# EAGLE board sensor (EAGLE 7.5.0)
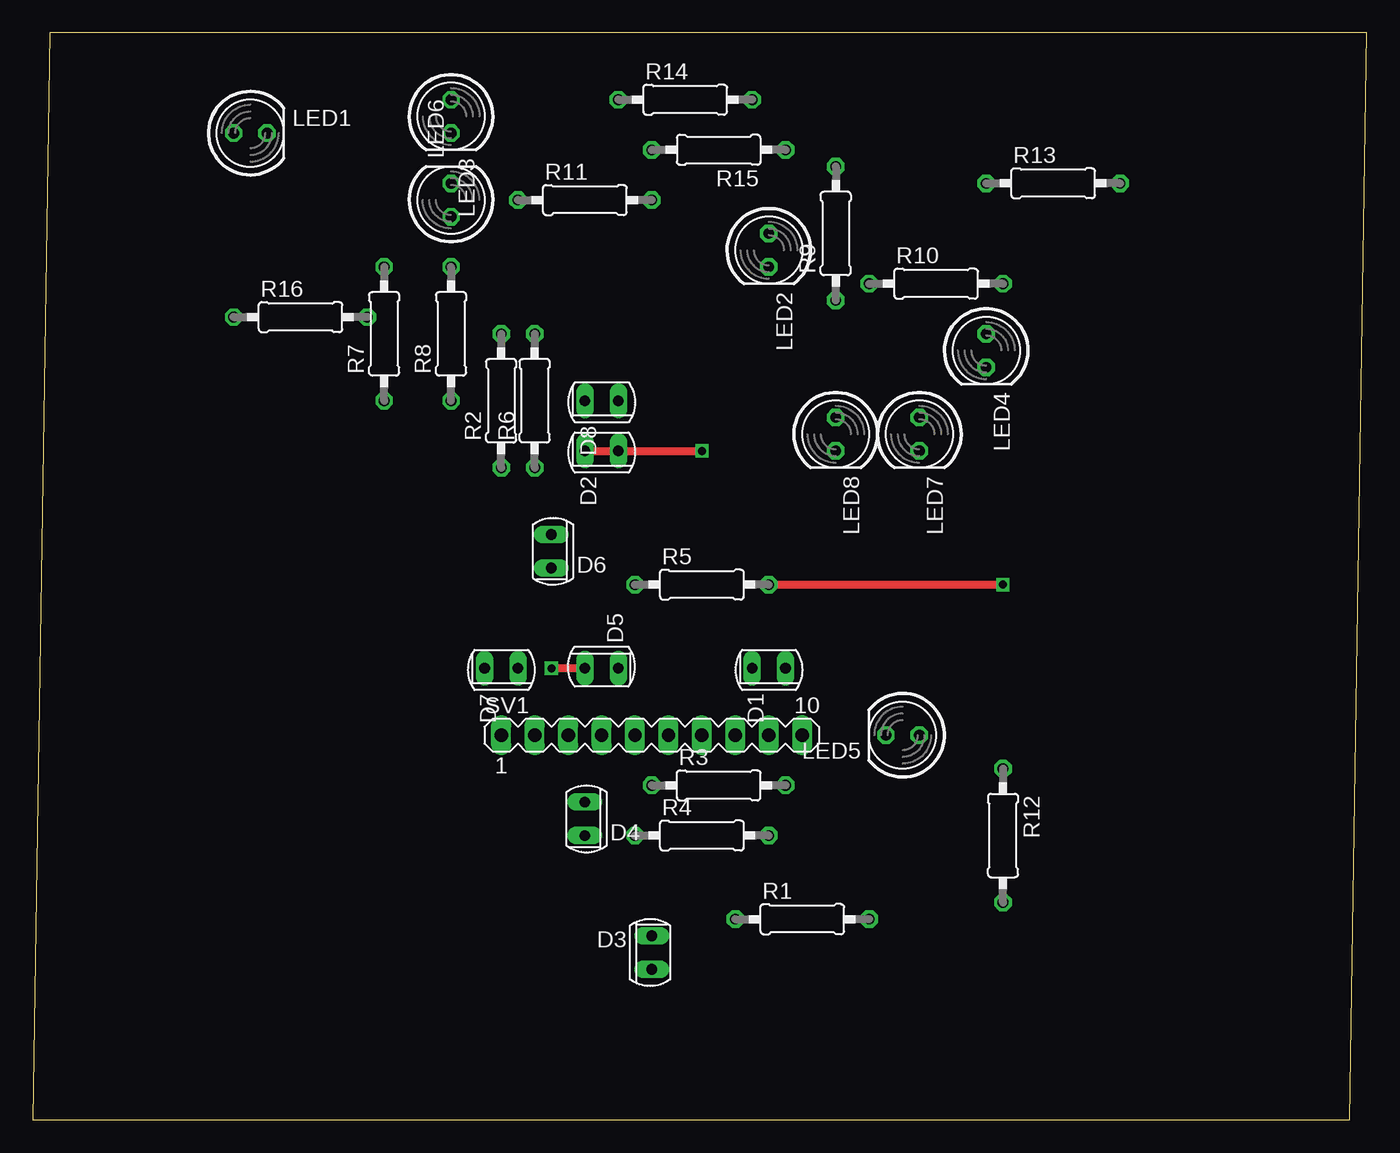
[diagram p0: board, top side]
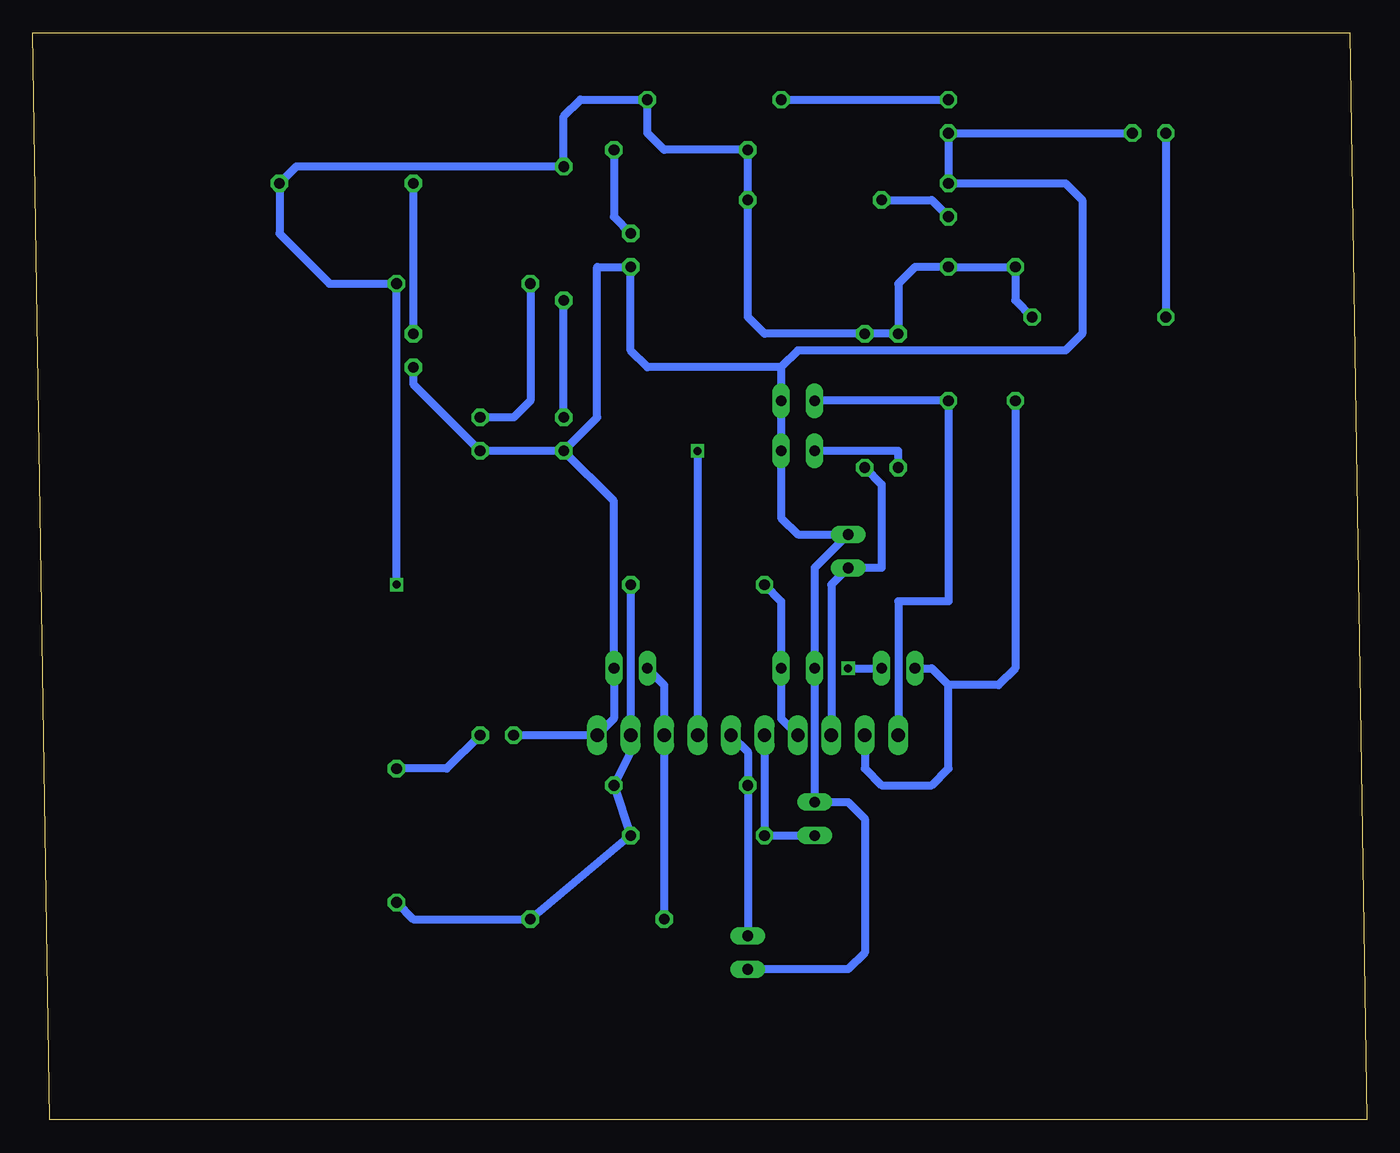
[diagram p1: board, bottom side, seen from below]

Size 101.27 x 82.54 mm. Coordinates in mm from the lower left corner, seen from the top.
Outline: 0,0 100,0 101.27,82.54 1.27,82.54 0,0
Copper layers (1*16): Top 0.035mm / dielectric 1.5mm / Bottom 0.035mm
Design rules "default": minimum track width 10mil, minimum drill 24mil, track to track 8mil, track to pad 8mil, pad to pad 8mil, via to via 8mil, smd to smd 8mil, copper to edge 40mil, drill to drill 8mil, minimum pad ring 10mil, minimum via ring 8mil, stop-mask expansion 4mil, vias tented up to drill 0mil, thermal gap 10mil

## Footprints (pad centres in the part's own frame; a part is rotated, then mirrored left to right if it is on the bottom)
SFH225 = drill 0.813 long: A 0,1.27; K 0,-1.27
LED5MM = drill 0.813 octagon: A -1.27,0; K 1.27,0
0207/10 = drill 0.813 octagon: 1 -5.08,0; 2 5.08,0
MA10-1 = drill 1.016 long: 1 -11.43,0; 2 -8.89,0; 3 -6.35,0; 4 -3.81,0; 5 -1.27,0; 6 1.27,0; 7 3.81,0; 8 6.35,0; 9 8.89,0; 10 11.43,0

## Placement (x,y rotation side)
D1  PhotoDioda  [SFH225]  55.88,34.29 270 top
D2  PhotoDioda  [SFH225]  43.18,50.8 270 top
D3  PhotoDioda  [SFH225]  46.99,12.7 180 top
D4  PhotoDioda  [SFH225]  41.91,22.86 0 top
D5  PhotoDioda  [SFH225]  43.18,34.29 90 top
D6  PhotoDioda  [SFH225]  39.37,43.18 0 top
D7  PhotoDioda  [SFH225]  35.56,34.29 270 top
D8  PhotoDioda  [SFH225]  43.18,54.61 270 top
LED1  LED putih SB  [LED5MM]  16.51,74.93 0 top
LED2  LED putih SB  [LED5MM]  55.88,66.04 270 top
LED3  LED putih SB  [LED5MM]  31.75,76.2 270 top
LED4  LED putih SB  [LED5MM]  72.39,58.42 270 top
LED5  LED putih SB  [LED5MM]  66.04,29.21 180 top
LED6  LED putih SB  [LED5MM]  31.75,69.85 90 top
LED7  LED putih SB  [LED5MM]  67.31,52.07 270 top
LED8  LED putih SB  [LED5MM]  60.96,52.07 270 top
R1  [0207/10]  58.42,15.24 0 top
R2  [0207/10]  35.56,54.61 90 top
R3  [0207/10]  52.07,25.4 0 top
R4  [0207/10]  50.8,21.59 0 top
R5  [0207/10]  50.8,40.64 0 top
R6  [0207/10]  38.1,54.61 90 top
R7  [0207/10]  26.67,59.69 90 top
R8  [0207/10]  31.75,59.69 90 top
R9  330  [0207/10]  60.96,67.31 90 top
R10  330  [0207/10]  68.58,63.5 0 top
R11  330  [0207/10]  41.91,69.85 0 top
R12  330  [0207/10]  73.66,21.59 270 top
R13  330  [0207/10]  77.47,71.12 0 top
R14  330  [0207/10]  49.53,77.47 0 top
R15  330  [0207/10]  52.07,73.66 180 top
R16  330  [0207/10]  20.32,60.96 0 top
SV1  [MA10-1]  46.99,29.21 0 top

## Library data of the parts
D1-D8 = opto-trans-siemens
LED1-LED8 = led
R1-R16 = resistor
SV1 = con-lstb

## Nets
GND: D1.A D2.A D3.A D4.A D5.A D6.A D7.A D8.A LED1.K LED2.K LED3.K LED4.K LED5.K LED6.K LED7.K LED8.K SV1.10
N$1: LED7.A R10.1
N$2: D7.K R7.1 SV1.2
N$3: D8.K R8.1 SV1.1
N$4: D1.K R1.1 SV1.8
N$5: D2.K R2.1 SV1.7
N$6: D3.K R3.1 SV1.6
N$7: D5.K R5.1 SV1.4
N$8: D4.K R4.1 SV1.5
N$9: D6.K R6.1 SV1.3
N$10: LED6.A R11.1
N$11: LED5.A R12.1
N$12: LED4.A R13.1
N$13: LED3.A R14.1
N$14: LED2.A R15.1
N$15: LED1.A R16.1
N$16: LED8.A R9.1
VCC: R1.2 R2.2 R3.2 R4.2 R5.2 R6.2 R7.2 R8.2 R9.2 R10.2 R11.2 R12.2 R13.2 R14.2 R15.2 R16.2 SV1.9

## Tracks (layer width: path | path; a pad name or v marks a point on that pad's centre or on a via)
GND  (via drill 0.6)
  Top 0.61: D5.A v39.37,34.29
  Bottom 0.61: LED1.K LED3.K LED6.K 22.86,71.12 21.59,69.85 21.59,59.69 22.86,58.42 43.18,58.42 44.45,57.15 | LED5.K SV1.10 57.15,30.48 D1.A 57.15,46.99 LED8.K | D3.A 39.37,11.43 38.1,12.7 38.1,22.86 39.37,24.13 D4.A D5.A 41.91,41.91 D6.A 43.18,44.45 44.45,45.72 D2.A D8.A 44.45,57.15 | 44.45,57.15 54.61,57.15 55.88,58.42 LED2.K 58.42,64.77 58.42,53.34 LED8.K | LED8.K LED7.K 72.39,55.88 LED4.K | v39.37,34.29 D7.A
N$1
  Bottom 0.61: R10.1 63.5,54.61 64.77,53.34 LED7.A
N$2
  Bottom 0.61: R7.1 26.67,34.29 27.94,33.02 31.75,33.02 | SV1.2 38.1,26.67 36.83,25.4 33.02,25.4 31.75,26.67 31.75,33.02 | D7.K 33.02,34.29 31.75,33.02
N$3
  Bottom 0.61: D8.K R8.1 31.75,39.37 35.56,39.37 SV1.1
N$4
  Bottom 0.61: R1.1 SV1.8 53.34,33.02 D1.K
N$5  (via drill 0.6)
  Top 0.61: D2.K v50.8,50.8
  Bottom 0.61: R2.1 35.56,50.8 D2.K | v50.8,50.8 SV1.7
N$6
  Bottom 0.61: D3.K R3.1 46.99,27.94 SV1.6
N$7
  Bottom 0.61: SV1.4 44.45,30.48 D5.K 44.45,39.37 R5.1
N$8
  Bottom 0.61: SV1.5 R4.1 D4.K
N$9
  Bottom 0.61: R6.1 36.83,48.26 36.83,41.91 D6.K 40.64,40.64 SV1.3
N$10
  Bottom 0.61: R11.1 33.02,69.85 LED6.A
N$11
  Bottom 0.61: LED5.A 69.85,26.67 R12.1
N$12
  Bottom 0.61: R13.1 LED4.A
N$13
  Bottom 0.61: R14.1 LED3.A
N$14
  Bottom 0.61: R15.1 57.15,68.58 LED2.A
N$15
  Bottom 0.61: LED1.A R16.1
N$16
  Bottom 0.61: LED8.A R9.1
VCC  (via drill 0.6)
  Top 0.61: R5.2 v73.66,40.64
  Bottom 0.61: R12.2 72.39,15.24 R1.2 R4.2 R3.2 55.88,27.94 SV1.9 R5.2 | R16.2 26.67,62.23 R7.2 R8.2 34.29,64.77 35.56,63.5 R2.2 R6.2 45.72,59.69 46.99,60.96 R11.2 R15.2 53.34,73.66 54.61,74.93 R14.2 59.69,77.47 60.96,76.2 R9.2 81.28,72.39 R13.2 82.55,67.31 78.74,63.5 R10.2 v73.66,40.64